# Altium PCB PCB1.PcbDoc
Units mm, origin at the board's own origin, x right, y up, seen from the top; angles counter-clockwise.
Board outline 75.56 x 79.76 mm, 2 copper layers (Top Layer, Bottom Layer); 12 components, 8 nets, 37 pads, 3 vias.
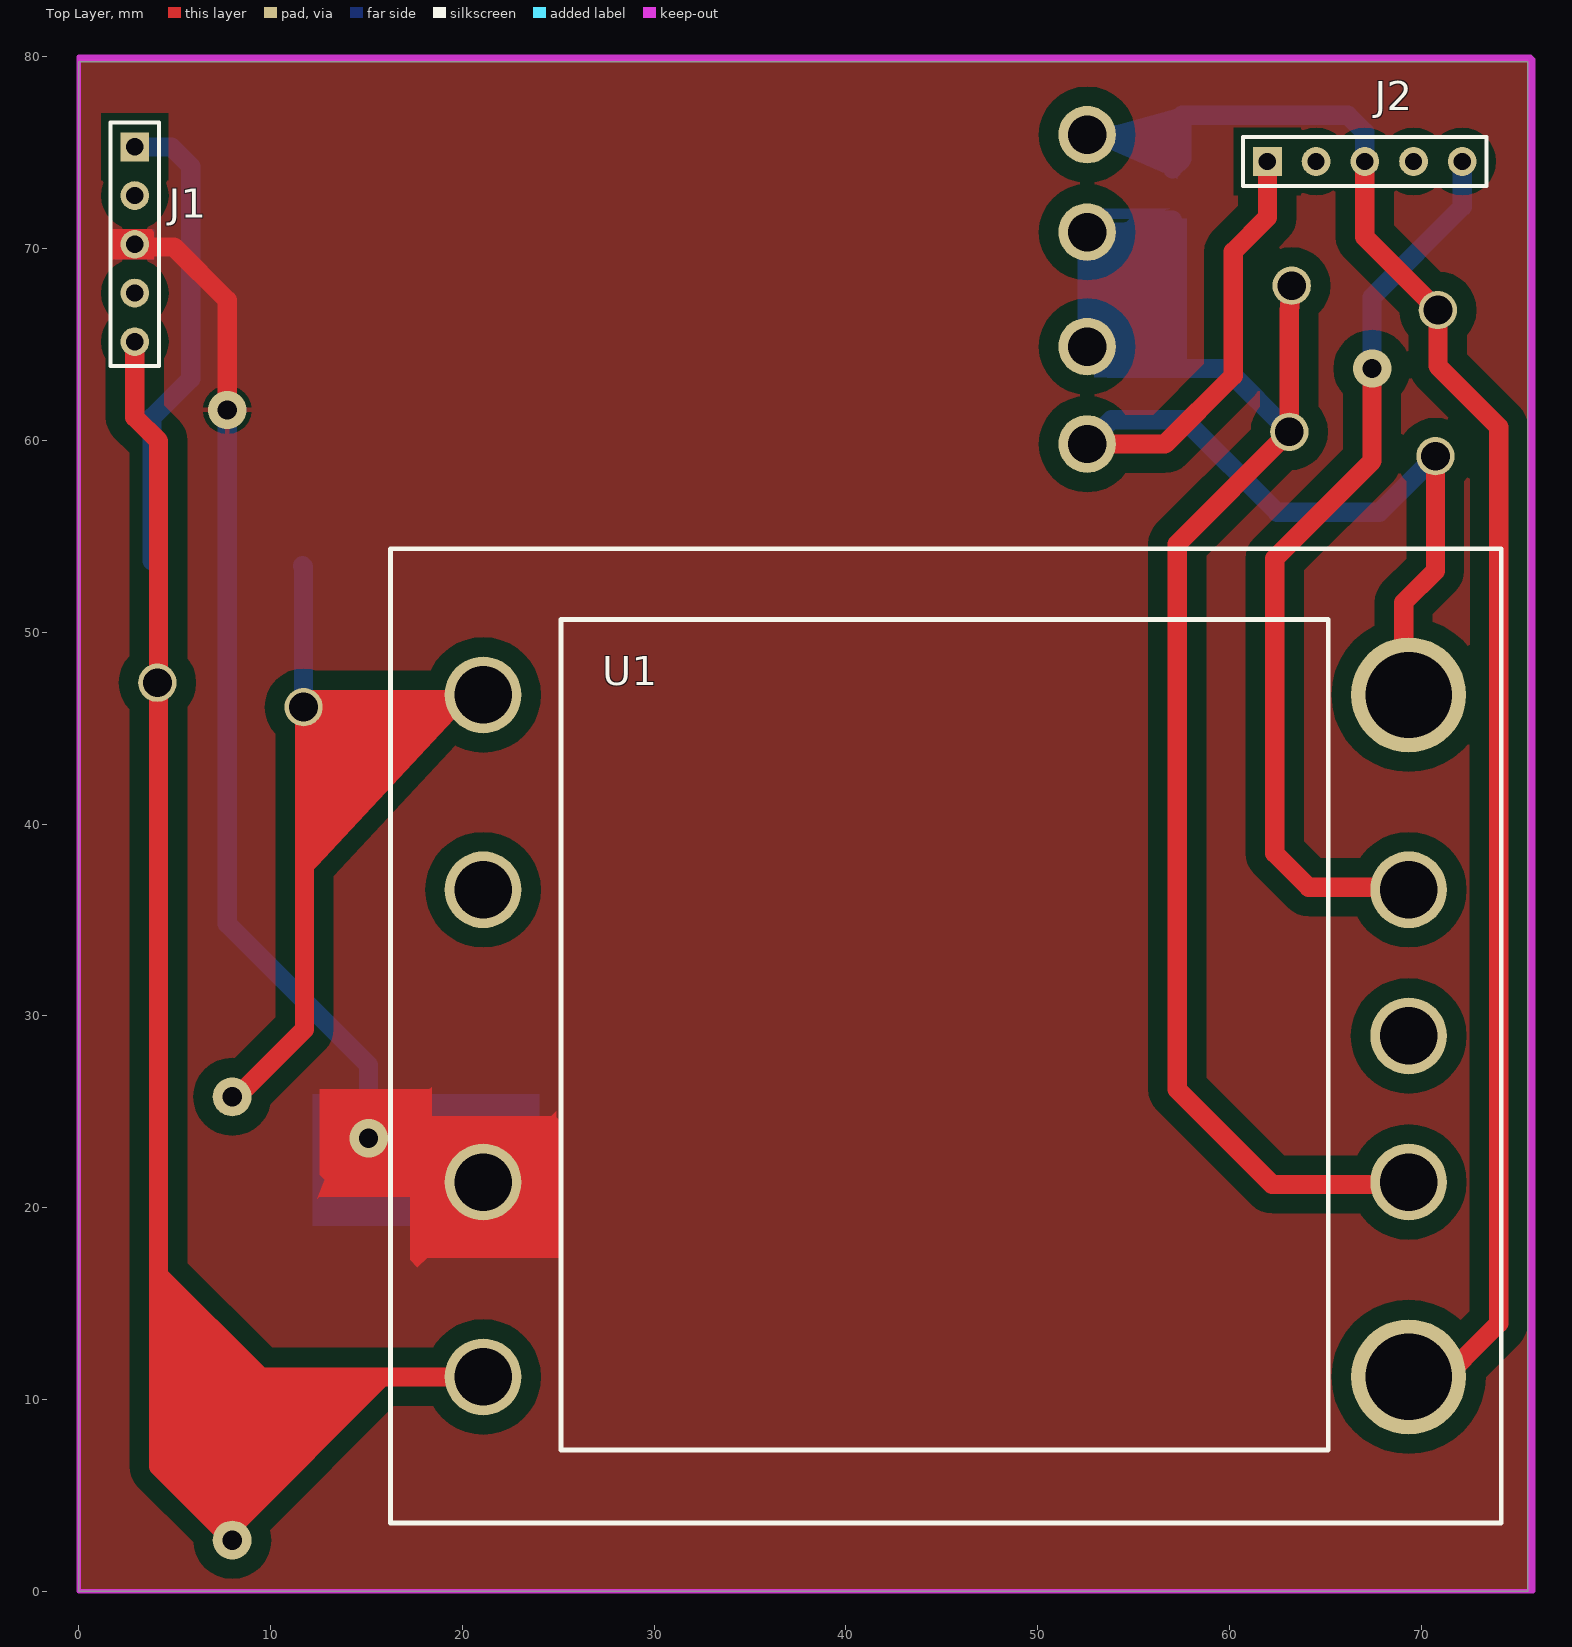
[diagram p0: Top Layer view]
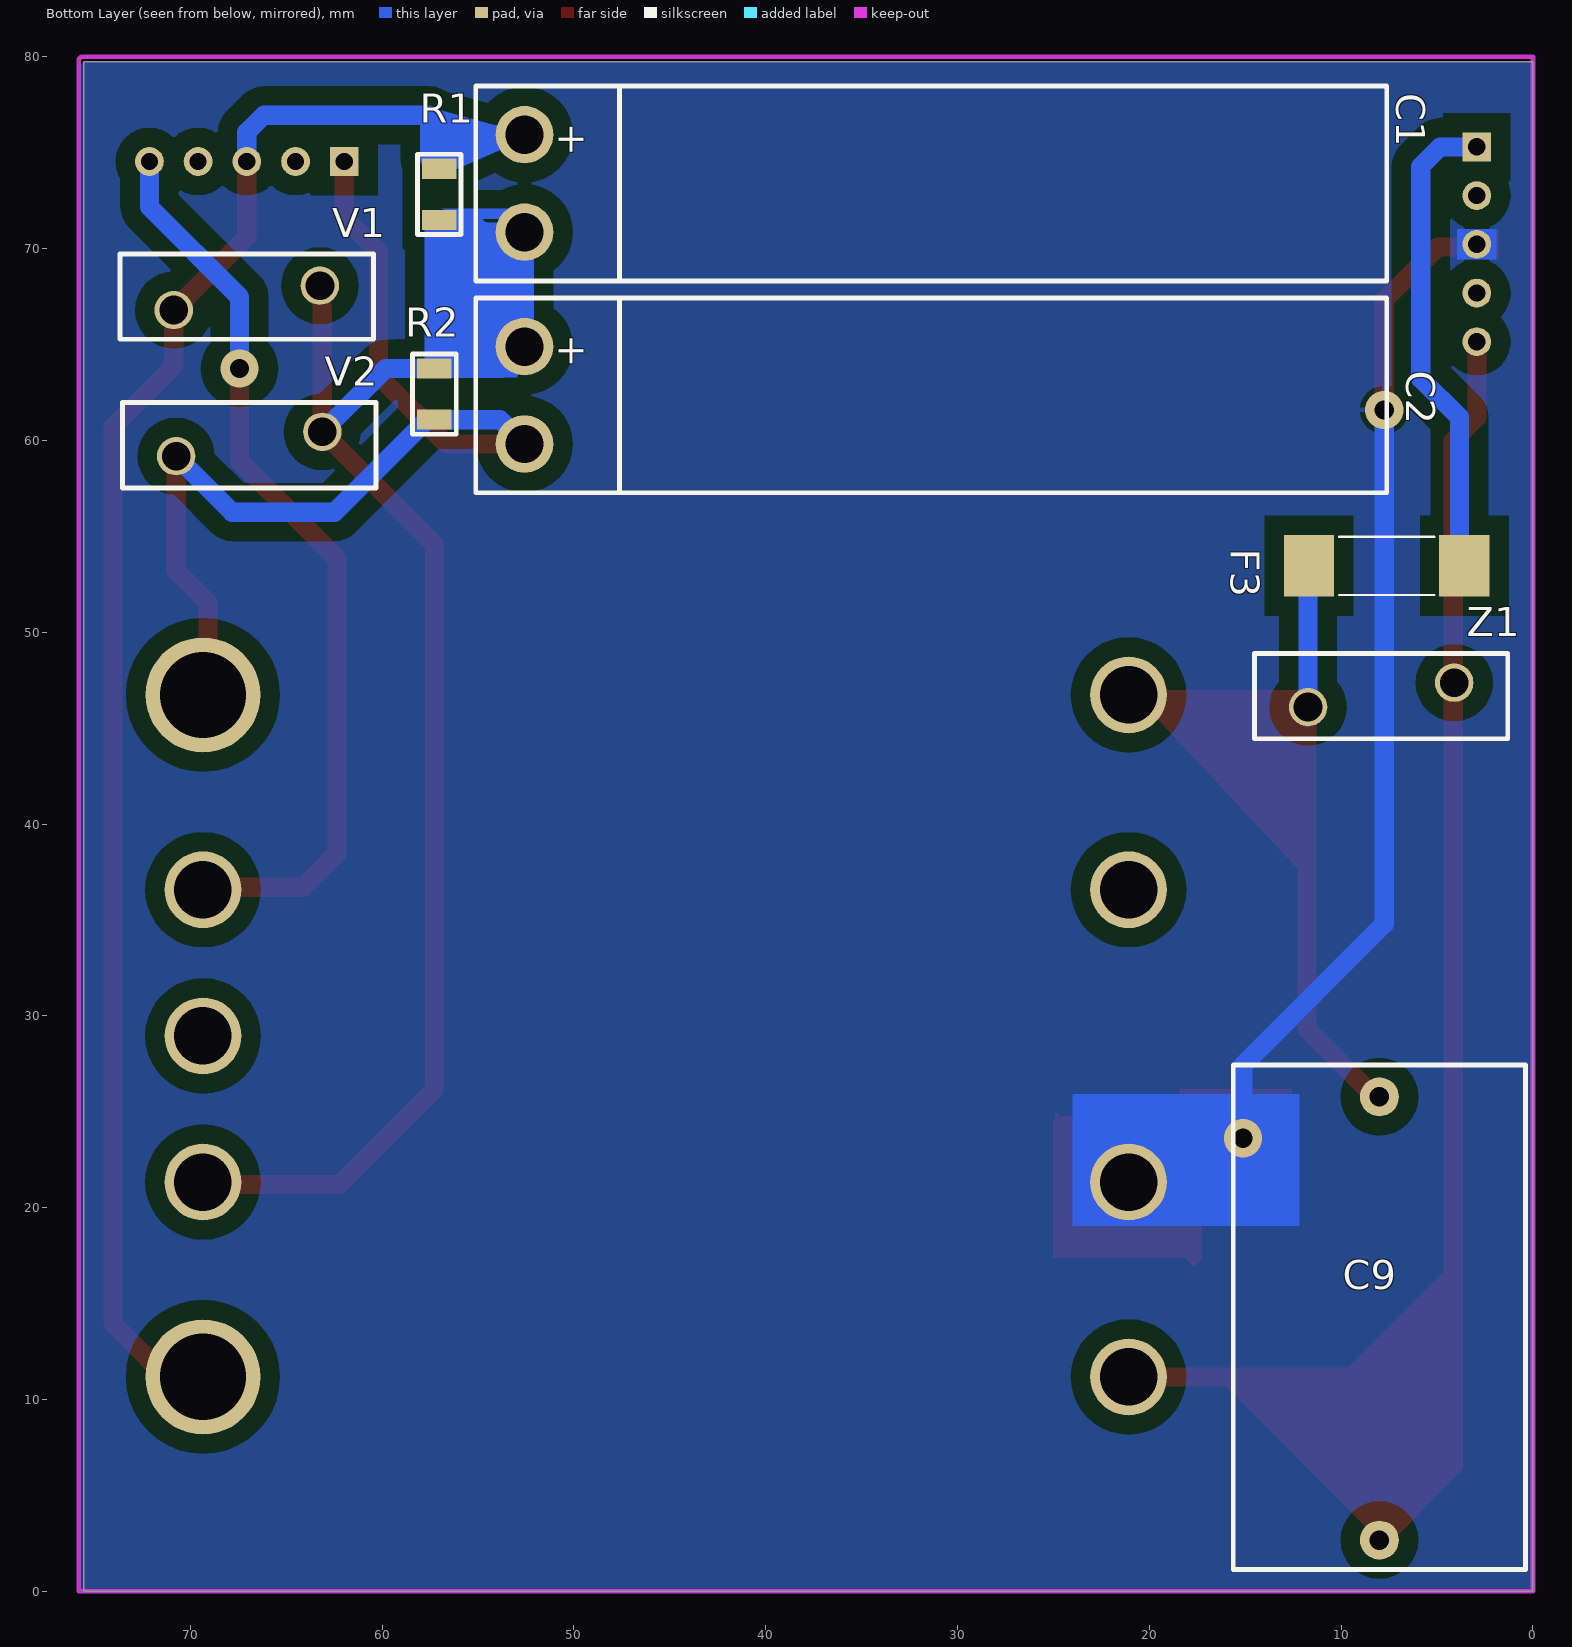
[diagram p1: Bottom Layer view, seen from below]
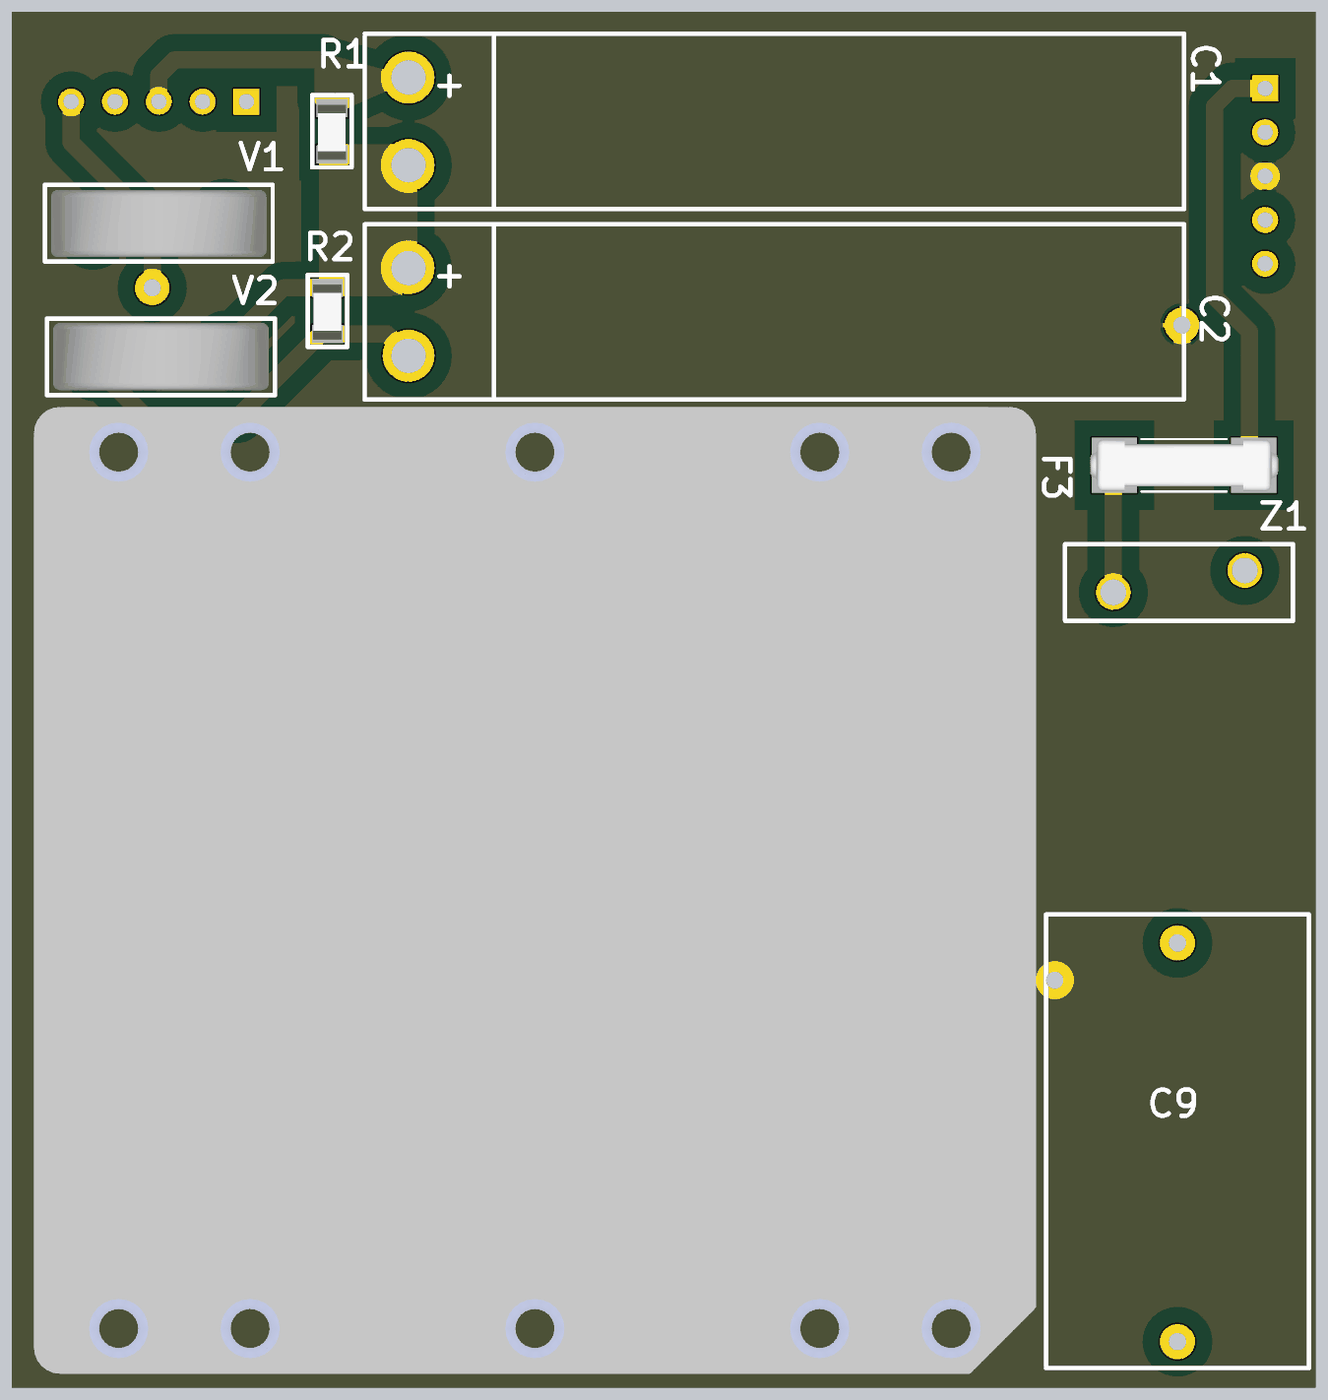
[diagram p2: 3D render of the assembled board from below, using the file's embedded part models]

## Layer stack, top to bottom
Top Solder: solder mask 0.0102, Solder Resist, Dk 3.5
Top Layer: signal copper 0.0356
Dielectric 1: dielectric 0.32, FR-4, Dk 4.8
Bottom Layer: signal copper 0.0356
Bottom Solder: solder mask 0.0102, Solder Resist, Dk 3.5

## Board outline
0,0 0,79.756 75.565,79.756 75.565,0

## Design rules (kind name [scope] priority, off if disabled: settings)
Clearance [All] p1: gap=1 ignorepadtopadclearanceinfootprint=TRUE
Height [All] p1: minheight=0 maxheight=30 prefheight=12.7
HoleSize [All] p1: absolutevalues=TRUE maxlimit=5 minlimit=0.025 maxpercent=80.000 minpercent=20.000
PolygonConnect [All] p1: connectstyle=Relief reliefconductorwidth=0.254 reliefentries=4 polygonreliefangle="90 Angle" airgapwidth=0.254
RoutingVias [All] p1: holewidth=1.5 width=2.5 viastyle="Through Hole" minholewidth=1.5 minwidth=2.5 maxholewidth=1.5 maxwidth=2.5
SilkToSolderMaskClearance [IsPad] p1 off: minsilkscreentomaskgap=0.254 clearancetoexposedcopper=TRUE
SolderMaskExpansion [All] p1: expansion=0.102
Width [All] p1: maxlimit=2 minlimit=0.8 preferedwidth=1 minimp=50.000000 maximp=50.000000 favimp=50.000000
27 further rules are at their usual default settings.

## Components (designator, comment, footprint, x,y, rotation, side; value= is the part's Value field where it differs from the comment)
C1 "EKXJ201ELL121MJ40S" "Chemicon elect cap" 52.578,73.406 r270 bottom
C2 "EKXJ201ELL121MJ40S" "Chemicon elect cap" 52.578,62.357 r270 bottom
C9 "ECQ-UAAF474T1" ECQ-UAAF474T1 8.001,14.224 r90 bottom
F3 "0678H9100-02" "Bel Fuse" 7.62,53.467 r0 bottom
J1 "Header 5" HDR1X5 2.921,75.311 r270 top
J2 "Header 5" HDR1X5 61.976,74.549 r0 top
R1 "RCS1206150KFKEA" "Vishay Resistor 1206" 57.023,72.898 r270 bottom
R2 "RCS1206150KFKEA" "Vishay Resistor 1206" 57.277,62.484 r270 bottom
U1 "FARM1T22" FARM1 21.082,11.176 r0 top
V1 "ERZV10D221" "MOV Panasonic" 67.056,67.437 r180 bottom
V2 "ERZV10D221" "MOV Panasonic" 66.929,59.817 r0 bottom
Z1 "MOV-10D471KTR" MOV-10D471KTR 7.91,46.736 r0 bottom

## Footprints (in the part's own frame and the unit in brackets; to place one, negate y for a bottom-side part, rotate by r counter-clockwise, add the part's x,y. Pads: shape width x height; smd on the part's side, far side on the other; paste and mask are expansions set on the pad)
"Bel Fuse" [mm] "0678H9100-02"
  rect 2.62x3.2 smd: 1(-4.047,0) 2(4.047,0)
  silkscreen extent -2.47,-1.52 2.47,1.52, body extent -5.45,-1.5 5.45,1.5, height 3
"Chemicon elect cap" [mm] "40mm"
  round 3 hole 2: 1(-2.54,0) 2(2.54,0)
  silkscreen extent -5.08,-2.54 5.08,44.96, body extent -5.05,-0.5 4.95,45.02, height 9.99
ECQ-UAAF474T1 [mil] "26x15"
  round 80 hole 40: 1(-455,0) 2(455,0)
  silkscreen extent -515,-300 520,300, body extent -515,-300 520,300, height 335
FARM1 [mm]
  round 4 hole 3: 1(0,0) 2(0,10.16) 3(0,25.4) 4(0,35.56) 6(48.26,25.4) 7(48.26,17.78) 8(48.26,10.16)
  round 6 hole 4.5: 5(48.26,35.56) 9(48.26,0)
  silkscreen extent -4.83,-7.62 53.09,43.18, body extent -4.87,-10.37 53.21,45.68, height 1.06
HDR1X5 [mm] "Connector; Header; 5 Position"
  rect 1.5x1.5 hole 0.9: 1(0,0)
  round 1.5 hole 0.9: 2(2.54,0) 3(5.08,0) 4(7.62,0) 5(10.16,0)
  silkscreen extent -1.27,-1.27 11.43,1.27
"MOV Panasonic" [mm] "ERZ-V10D221"
  round 2 hole 1.5: 1(-3.81,-0.635) 2(3.81,0.635)
  silkscreen extent -6.6,-2.16 6.6,2.29, body extent -6.25,-1.91 6.25,1.99, height 14.25
MOV-10D471KTR [mm]
  round 2 hole 1.5: 1(-3.81,-0.635) 2(3.81,0.635)
  silkscreen extent -6.6,-2.16 6.6,2.29, body extent -6.73,-1.03 6.77,15.89
"Vishay Resistor 1206" [mm] "1206"
  rect 1.05x1.8 smd: 1(-1.27,0) 2(1.397,0)
  silkscreen extent -2.03,-1.14 2.16,1.14, body extent -1.47,-1.91 2.79,0.83, height 0.53

## Part data
C1 C2: "Condensadores electrolíticos de aluminio (con terminales radiales) 120uF 200Volts", ComponentLink1Description=EKXJ201ELL121MJ40S, ComponentLink1URL=https://www.mouser.es/ProductDetail/United-Chemi-Con/EKXJ201ELL121MJ40S?qs=RpYEFuZ7GTiczXQxYsnqXQ%3D%3D
C9: library part "Panasonic Safety Film Cap", "Condensadores de seguridad 275VAC 0.47uF 10% L/S=22.5mm AEC-Q200", ComponentLink1Description=ECQ-UAAF474T1, ComponentLink1URL=https://www.mouser.es/ProductDetail/Panasonic/ECQ-UAAF474T1?qs=byeeYqUIh0OjVBR1dvCIcA%3D%3D
F3: library part "Bel Fuse", "Fusibles de montaje en superficie 3925 Surface Mt Fuse 10A", ComponentLink1Description=0678H9100-02, ComponentLink1URL=https://www.mouser.es/ProductDetail/Bel-Fuse/0678H9100-02?qs=sGAEpiMZZMsIz3CjQ1xegQaWavv5npkeqjhkdzw46zcL4ULcSDYduw%3D%3D
J1 J2: "Header, 5-Pin", LatestRevisionDate=17-Jul-2002, LatestRevisionNote="Re-released for DXP Platform.", Publisher="Altium Limited"
R1: library part Vishay, "SMD 0.5watt 150Kohms 1%", ComponentLink1Description=RCS1206150KFKEA, ComponentLink1URL=https://www.mouser.es/ProductDetail/Vishay-Dale/RCS1206150KFKEA?qs=sGAEpiMZZMtlubZbdhIBIAh%252BOLxU8fCrFpMos3Ns0tQ%3D
R2: library part Vishay, "SMD 0.5watt 150Kohms", ComponentLink1Description=RCS1206150KFKEA, ComponentLink1URL=https://www.mouser.es/ProductDetail/Vishay-Dale/RCS1206150KFKEA?qs=sGAEpiMZZMtlubZbdhIBIAh%252BOLxU8fCrFpMos3Ns0tQ%3D
U1: library part FARM1, "AC front end module which provides EMI filtering, autoranging line rectification / and inrush current limiting", ComponentLink1Description=FARM1T22, ComponentLink1URL=https://www.mouser.es/ProductDetail/Vicor/FARM1T22?qs=%2Fha2pyFadui0ZjEYzWnct3R1NhUFpdHSrcMcwrYbnvc%3D, ComponentLink2Description=Datasheet, ComponentLink2URL=https://www.mouser.es/datasheet/2/685/ds_farm-934562.pdf
V1 V2: library part "MOV ERZ Panasonic", "Varistores 220V 25A CLAMP", ComponentLink1Description=ERZV10D221, ComponentLink1URL=https://industrial.panasonic.com/ww/products/emc-circuit-protection/circuit-protection/surge-components/models/ERZV10D221
Z1: "470V 2.5kA Varistor 1 Circuit Through Hole Disc 10mm"

## Via types
v1: diameter 2, hole 1, Top Layer to Bottom Layer, 3 vias

## Nets (pads, with @x,y where several pads share a name; then routed paths per layer and width w, separated by ;. In a path a pad name is that pad's centre, name@x,y a point inside that pad or via, vN(x,y) a via of type N, cw(c..) or ccw(c..) an arc to the next point about the centre after c; other vN are vias at no path point)
NetC1_1: C1.1 J2.3 R1.1 U1.9 V1.1 | length 85.6
  Top Layer w1: J2.3 67.056,70.612 V1.1 70.866,63.881 74.041,60.706 74.041,60.579 74.041,13.97 U1.9@70.485,10.414
  Bottom Layer w1: C1.1 55.245,75.946 ; R1.1 57.531,74.676 57.531,76.962 66.167,76.962 67.056,76.073 J2.3
NetC1_2: C1.2 C2.1 R1.2 R2.1 U1.8 V1.2 V2.1 | length 82.9
  Top Layer w1: V1.2 63.119,66.751 V2.1 57.277,54.61 57.277,26.162 62.23,21.209 69.215,21.209 69.342,21.082 69.977,21.082 U1.8@70.485,20.574
  Bottom Layer w1: R1.2 55.423,71.501 54.788,70.866 C1.2 C2.1 53.721,63.754 R2.1 59.817,63.754 V2.1
NetC2_2: C2.2 J2.1 R2.2 U1.5 V2.2 | length 57.4
  Top Layer w1: C2.2 56.642,59.817 60.198,63.373 60.198,69.85 61.976,71.628 J2.1 ; U1.5@70.485,45.974 69.088,47.371 69.088,51.562 70.739,53.213 V2.2
  Bottom Layer w1: C2.2 53.848,61.087 R2.2 57.658,61.087 62.484,56.261 67.818,56.261 V2.2
NetC9_1: C9.1 J1.5 U1.1 Z1.1 | length 83.5
  Top Layer w1: J1.5 2.921,61.214 4.153,59.982 4.153,11.176 ; C9.1 4.153,6.515 4.153,11.176 ; U1.1@20.828,11.811 U1.1@22.225,10.414 ; U1.1 4.153,11.176
NetC9_2: C9.2 F3.2 U1.4 Z1.2 | length 40
  Top Layer w1: C9.2@8.255,25.781 11.773,29.299 11.773,45.974 U1.4@22.225,45.974
  Bottom Layer w1: F3.2 11.72,53.414 Z1.2 11.72,45.646 Z1.2@11.773,45.593
NetF3_1: F3.1 J1.1 | length 24.8
  Bottom Layer w1: J1.1 4.826,75.311 5.842,74.295 5.842,63.226 3.827,61.211 F3.1@3.827,53.721
NetJ2_5: J2.5 U1.6 | length 49.4
  Top Layer w1: v1(67.437,63.754) 67.437,58.928 62.357,53.848 62.357,38.481 64.135,36.703 69.596,36.703 U1.6@70.485,35.814
  Bottom Layer w1: v1(67.437,63.754) 67.437,67.488 72.136,72.187 J2.5
PE: J1.3 U1.2 | length 61.1
  Top Layer w1: J1.3@3.06,70.092 4.965,70.092 7.747,67.31 v1(7.747,61.595) ; v1(15.113,23.622) 17.145,21.59 19.939,21.59 20.955,20.574 U1.2@22.225,20.574
  Bottom Layer w1: J1.3 J1.3@3.06,70.092 ; v1(7.747,61.595) 7.747,34.798 15.113,27.432 v1(15.113,23.622)
pads on no net: J1.2 J1.4 J2.2 J2.4 U1.3 U1.7

## Polygon pours and split planes (outlines as drawn)
PE on Bottom Layer "PE" (solid, pour order 2): 0,79.756 0,0 75.692,0 75.692,79.629 75.565,79.756
PE on Top Layer (solid, pour order 4): 0,79.883 75.565,79.883 75.692,79.756 75.692,0 0.127,0 0,0.127

## Keep-outs
Top Layer:
  lines w0.254: 0,0 75.692,0 75.629,0.064 75.629,79.819 75.565,79.883 0,79.883 0,0
Keep-Out Layer:
  lines w0.254: 0,0 75.819,0 75.819,79.883 75.692,80.01 0,80.01 0,0

## Other copper
Top Layer:
  region net NetC9_1: 4.154,17.182 10.16,11.176 4.28,11.176 4.217,11.239
  region net NetC9_1: 16.637,11.303
  region net NetC9_1: 8.001,2.667 16.637,11.303 4.28,11.303 4.153,11.176 4.153,6.515
  region net PE: 3.81,71.015 1.778,71.015 1.778,69.447 3.917,69.447 3.917,70.847 3.898,70.866
  region net PE: 3.81,71.015 1.778,71.015 1.778,69.447 3.917,69.447 3.917,70.847 3.898,70.866
  region net PE: 3.594,71.146
  region net PE: 12.827,21.463 12.573,21.717 12.573,26.162 18.274,26.162 18.401,26.289 18.415,26.275 18.415,20.574 12.551,20.574 12.446,20.469
  region net PE: 24.892,25.019 24.638,24.765 17.272,24.765 17.272,17.272 17.653,16.891 18.161,17.399 25.019,17.399 25.019,24.59 24.892,24.717
  region net NetC9_2: 11.72,37.084 20.955,46.99 11.72,46.99
Bottom Layer:
  region net PE: 24.003,25.908 12.192,25.908 12.192,19.05 24.003,19.05
  region net PE: 3.937,70.993 3.915,71.015 1.905,71.015 1.905,69.447 3.937,69.447
  region net NetC1_1: 52.152,75.9 57.404,77.343 57.277,73.66
  region net NetC1_2: 53.086,70.929 53.721,71.564 57.785,71.564 57.785,63.817 57.277,63.309 52.959,63.309 52.959,71.945 53.086,72.072 56.896,72.072

## Text inside footprints (layer, text, board x,y; h text height)
C1: Bottom Overlay "+" at 50.8,76.581 h1.52 r90
C2: Bottom Overlay "+" at 50.8,65.532 h1.52 r90